# EAGLE board Tic-Tac-Toe (EAGLE 9.7.0)

Size 187.35 x 176.22 mm. Coordinates in mm from the lower left corner, seen from the top.
Outline: 0,0 187.35,0 187.35,176.22 0,176.22 0,0
Copper layers (1*16): Top 0.035mm / dielectric 1.5mm / Bottom 0.035mm
Design rules "default": minimum track width 6mil, minimum drill 0.35mm, track to track 6mil, track to pad 6mil, pad to pad 6mil, via to via 6mil, smd to smd 6mil, copper to edge 40mil, drill to drill 6mil, minimum pad ring 10mil, minimum via ring 8mil, stop-mask expansion 4mil, vias tented up to drill 0mil, thermal gap 10mil

## Footprints (pad centres in the part's own frame; a part is rotated, then mirrored left to right if it is on the bottom)
LED-RGB-5MM = drill 0.9: B 0.635,0.635; C -0.635,-0.635; G 1.905,-0.635; R -1.905,0.635
RESAD1016W63L850D250B = drill 0.83 pad 1.43: 1 -5.08,0; 2 5.08,0
SWITCH-MOMENTARY-PTH-6.5MM = drill 1.016 pad 1.88: 1 -3.251,2.261; 2 3.251,2.261; 3 -3.251,-2.261; 4 3.251,-2.261
ARDUINO-UNO-R3-SHIELD = drill 1.016 pad 1.88: 3.3V 24.13,-2.54; 5V 24.13,0; A0 24.13,12.7; A1 24.13,15.24; A2 24.13,17.78; A3 24.13,20.32; A4 24.13,22.86; A5 24.13,25.4; AREF -24.13,-13.97; D2 -24.13,20.32; D3 -24.13,17.78; D4 -24.13,15.24; D5 -24.13,12.7; D6 -24.13,10.16; D7 -24.13,7.62; D8 -24.13,3.81; D9 -24.13,1.27; D10 -24.13,-1.27; D11 -24.13,-3.81; D12 -24.13,-6.35; D13 -24.13,-8.89; GND@0 24.13,2.54; GND@1 24.13,5.08; GND@2 -24.13,-11.43; IOREF 24.13,-7.62; NC 24.13,-10.16; RES 24.13,-5.08; RX -24.13,25.4; SCL -24.13,-19.05; SDA -24.13,-16.51; TX -24.13,22.86; VIN 24.13,7.62

## Placement (x,y rotation side)
D1  LED-RGBRCBG-PTH  [LED-RGB-5MM]  6.53,78.14 0 top
D2  LED-RGBRCBG-PTH  [LED-RGB-5MM]  35.77,78.48 0 top
D3  LED-RGBRCBG-PTH  [LED-RGB-5MM]  64.14,78.35 0 top
D4  LED-RGBRCBG-PTH  [LED-RGB-5MM]  5.96,46.86 0 top
D5  LED-RGBRCBG-PTH  [LED-RGB-5MM]  35.65,46.86 0 top
D6  LED-RGBRCBG-PTH  [LED-RGB-5MM]  64.73,46.86 0 top
D7  LED-RGBRCBG-PTH  [LED-RGB-5MM]  5.78,17.09 0 top
D8  LED-RGBRCBG-PTH  [LED-RGB-5MM]  36.13,17.34 0 top
D9  LED-RGBRCBG-PTH  [LED-RGB-5MM]  65.09,17.34 0 top
R1  1k  [RESAD1016W63L850D250B]  180.39,67.95 90 top
R2  1k  [RESAD1016W63L850D250B]  180.74,12.7 90 top
R3  1k  [RESAD1016W63L850D250B]  152.81,12.34 90 top
R4  1k  [RESAD1016W63L850D250B]  121.07,8.97 90 top
R5  1k  [RESAD1016W63L850D250B]  150.75,69.25 90 top
R6  1k  [RESAD1016W63L850D250B]  120.12,68.61 90 top
R7  1k  [RESAD1016W63L850D250B]  120.81,38.4 90 top
R8  1k  [RESAD1016W63L850D250B]  151.71,39.04 90 top
R9  1k  [RESAD1016W63L850D250B]  181.02,38.57 90 top
S2  SWITCH_MOMENTARY  [SWITCH-MOMENTARY-PTH-6.5MM]  178.48,47.46 90 top
S3  SWITCH_MOMENTARY  [SWITCH-MOMENTARY-PTH-6.5MM]  149.17,47.93 90 top
S4  SWITCH_MOMENTARY  [SWITCH-MOMENTARY-PTH-6.5MM]  118.27,47.29 90 top
S5  SWITCH_MOMENTARY  [SWITCH-MOMENTARY-PTH-6.5MM]  117.58,77.5 90 top
S6  SWITCH_MOMENTARY  [SWITCH-MOMENTARY-PTH-6.5MM]  148.21,78.14 90 top
S7  SWITCH_MOMENTARY  [SWITCH-MOMENTARY-PTH-6.5MM]  177.85,76.84 90 top
S8  SWITCH_MOMENTARY  [SWITCH-MOMENTARY-PTH-6.5MM]  150.27,21.23 90 top
S9  SWITCH_MOMENTARY  [SWITCH-MOMENTARY-PTH-6.5MM]  118.83,20.6 90 top
S10  SWITCH_MOMENTARY  [SWITCH-MOMENTARY-PTH-6.5MM]  178.2,21.59 90 top
U1  ARDUINO-UNO-R3-SHIELD  [ARDUINO-UNO-R3-SHIELD]  86.26,146.38 90 top

## Library data of the parts
D1-D9 R1-R9 S2-S10 U1 = Tinkercad

## Nets
U1_3.3V: S2.1 S3.1 S4.1 S5.1 S6.1 S7.1 S8.1 S9.1 S10.1 U1.3.3V
U1_A0: R7.2 S4.3 S4.4 U1.A0
U1_A1: R1.2 S7.3 S7.4 U1.A1
U1_A2: R5.2 S6.3 S6.4 U1.A2
U1_A3: R6.2 S5.3 S5.4 U1.A3
U1_D2: D1.C D4.C D7.C U1.D2
U1_D3: D7.R D8.R D9.R U1.D3
U1_D4: D4.R D5.R D6.R U1.D4
U1_D5: D1.R D2.R D3.R U1.D5
U1_D6: D1.B D2.B D3.B U1.D6
U1_D7: D4.B D5.B D6.B U1.D7
U1_D8: D7.B D8.B D9.B U1.D8
U1_D9: R2.2 S10.3 S10.4 U1.D9
U1_D10: R3.2 S8.3 S8.4 U1.D10
U1_D11: R4.2 S9.3 S9.4 U1.D11
U1_D12: R9.2 S2.3 S2.4 U1.D12
U1_D13: R8.2 S3.3 S3.4 U1.D13
U1_GND: R1.1 R2.1 R3.1 R4.1 R5.1 R6.1 R7.1 R8.1 R9.1 U1.GND@0 U1.GND@1 U1.GND@2
U1_RX: D3.C D6.C D9.C U1.RX
U1_TX: D2.C D5.C D8.C U1.TX

## Tracks (layer width: path | path; a pad name or v marks a point on that pad's centre or on a via)
U1_3.3V  (9 unrouted)
U1_A0  (3 unrouted)
U1_A1  (3 unrouted)
U1_A2  (3 unrouted)
U1_A3  (3 unrouted)
U1_D2  (3 unrouted)
U1_D3  (3 unrouted)
U1_D4  (3 unrouted)
U1_D5  (3 unrouted)
U1_D6  (3 unrouted)
U1_D7  (3 unrouted)
U1_D8  (3 unrouted)
U1_D9  (3 unrouted)
U1_D10  (3 unrouted)
U1_D11  (3 unrouted)
U1_D12  (3 unrouted)
U1_D13  (3 unrouted)
U1_GND  (11 unrouted)
U1_RX  (3 unrouted)
U1_TX  (3 unrouted)